# Altium PCB 显示面板.PcbDoc
Units mil, origin at the board's own origin, x right, y up, seen from the top; angles counter-clockwise.
Board outline 5905.51 x 1968.5 mil, 2 copper layers (Top Layer, Bottom Layer); 14 components, 16 nets, 74 pads, 3 vias.
Unrouted connection lines stored in the file: 2.
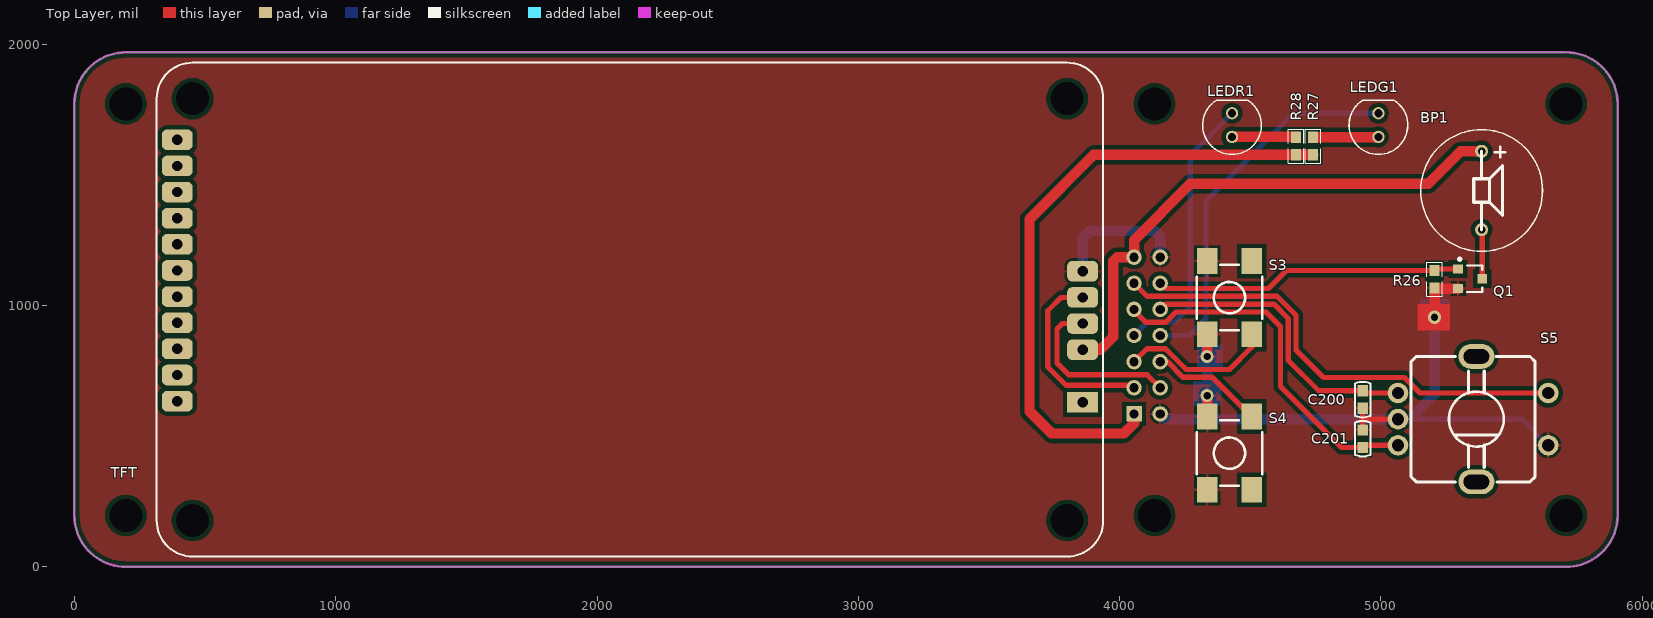
[diagram p0: Top Layer view]
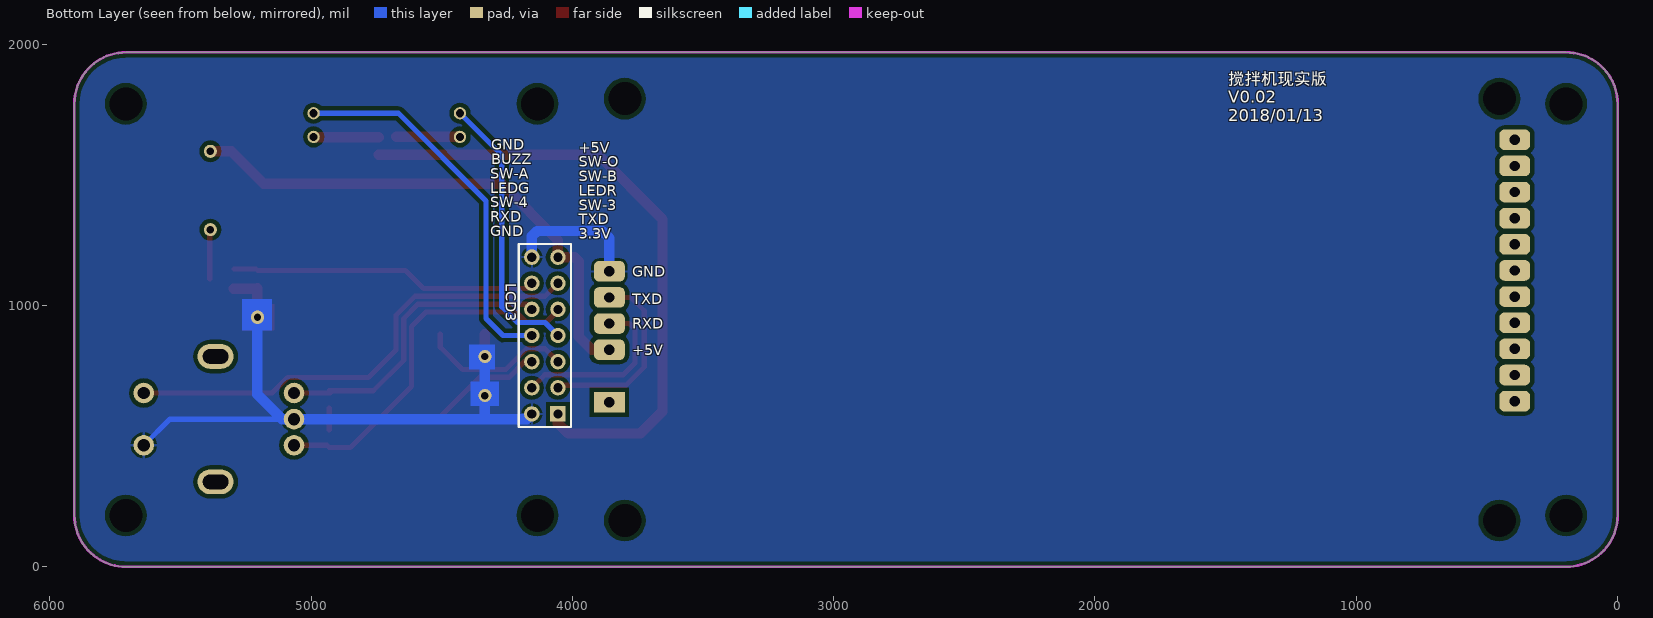
[diagram p1: Bottom Layer view, seen from below]
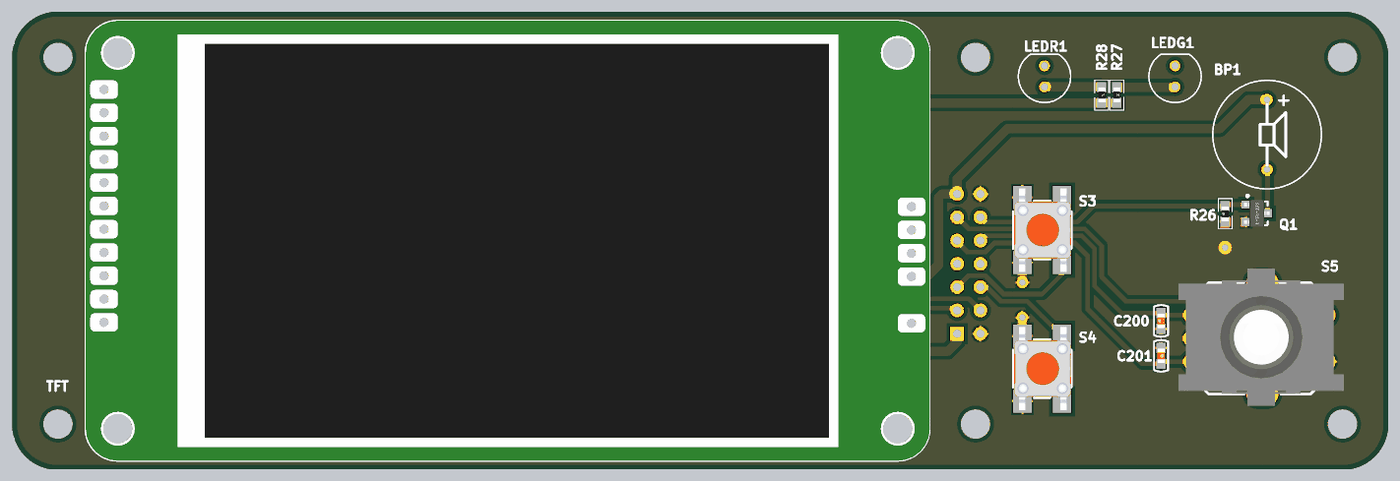
[diagram p2: 3D render of the assembled board from above, using the file's embedded part models]

## Layer stack, top to bottom
Top Solder: solder mask 0.4, Solder Resist, Dk 3.5
Top Layer: signal copper 1.4
Dielectric 1: dielectric 12.6, FR-4, Dk 4.8
Bottom Layer: signal copper 1.4
Bottom Solder: solder mask 0.4, Solder Resist, Dk 3.5

## Board outline
0,196.85 ccw(c196.85,196.85) 196.85,0 5707.72,0 ccw(c5708.66,196.85) 5905.51,196.85 5905.51,1771.65 ccw(c5708.66,1771.65) 5708.66,1968.5 196.85,1968.5 ccw(c196.85,1771.65) 0,1772.01

## Design rules (kind name [scope] priority, off if disabled: settings)
Clearance [All] p1: gap=10
PolygonConnect [All] p1: connectstyle=Relief reliefconductorwidth=10 reliefentries=4 polygonreliefangle="90 Angle" airgapwidth=10
RoutingVias [All] p1: holewidth=28 width=50 viastyle="Through Hole" minholewidth=28 minwidth=50 maxholewidth=28 maxwidth=50
SolderMaskExpansion [All] p1: expansion=4
Width [All] p1: maxlimit=40 minlimit=10 preferedwidth=10
30 further rules are at their usual default settings.

## Components (designator, comment, footprint, x,y, rotation, side; value= is the part's Value field where it differs from the comment)
BP1 "BUZZER" 蜂鸣器 5385,1440 r270 top
C200 "Cap" C-RAD-0603 4930,640 r90 top
C201 "Cap" C-RAD-0603 4930,490 r270 top
LCD3 "Header 7X2" HDR7X2_A1 4055,585 r90 bottom
LEDG1 "COLOUR" LEDφ6 4990,1645 r90 top
LEDR1 "COLOUR" LEDφ6 4430,1645 r90 top
Q1 "CJ2304" SOT-23 5341.14,1102.05 r270 top
R26 "Res1" 0603-1 5205,1100 r90 top
R27 "Res1" 0603-1 4740,1610 r270 top
R28 "Res1" 0603-1 4675,1610 r270 top
S3 "SW-PB4" SW_PB4_A1 4420,1030 r270 top
S4 "SW-PB4" SW_PB4_A1 4420,435 r270 top
S5 "SW-EC11" EC11 5365,565 r270 top
TFT "USART_LCD" 3.0寸 3937.01,1929.13 r180 top

## Footprints (in the part's own frame and the unit in brackets; to place one, negate y for a bottom-side part, rotate by r counter-clockwise, add the part's x,y. Pads: shape width x height; smd on the part's side, far side on the other; paste and mask are expansions set on the pad)
3.0寸 [mm]
  rect 3x2 hole 1: 1(2,33)
  rrect50% 3x2 hole 1: 2(2,27.9) 3(2,25.36) 4(2,22.82) 5(2,20.28) 6(90,7.5) 7(90,10.04) 8(90,12.58) 9(90,15.12) 10(90,17.66) 11(90,20.2) 12(90,22.74) 13(90,25.28) 14(90,27.82) 15(90,30.36) 16(90,32.9)
  round 1.016 hole 3.2: ""(3.5,44.5) ""(3.5,3.5) ""(88.5,3.5) ""(88.5,44.5)
  silkscreen extent 0,0 92,48, body extent -0.03,0 91.97,48, height 6.64
0603-1 [mm] "贴片带丝印"
  rect 1.1x1 smd: 1(-0.85,0) 2(0.85,0)
  silkscreen extent -1.65,-0.76 1.65,0.76, body extent -0.8,-0.38 0.8,0.42, height 0.3
C-RAD-0603 [mm] "贴片电容"
  rect 1.1x1 smd: 1(-0.85,0) 2(0.85,0)
  silkscreen extent -1.73,-0.76 1.73,0.76, body extent -0.8,-0.38 0.8,0.42, height 0.3
EC11 [mm]
  round 2 hole 1.2: 1(-2.54,-7.62) 2(0,-7.62) 3(2.54,-7.62) 4(2.54,6.985) 5(-2.54,6.985)
  oval 2.4x3.5 hole 1.4 slot 2.5 at 90 deg: 6(-6.096,0) 7(6.096,0)
  silkscreen extent -6.1,-6.35 6.1,5.72, body extent -7.63,-9.13 7.37,8.87, height 24.5
HDR7X2_A1 [mm] "Connector; Header; 7x2 Position"
  rect 1.5x1.5 hole 0.9: 1(0,0)
  round 1.5 hole 0.9: 2(0,2.54) 3(2.54,0) 4(2.54,2.54) 5(5.08,0) 6(5.08,2.54) 7(7.62,0) 8(7.62,2.54) 9(10.16,0) 10(10.16,2.54) 11(12.7,0) 12(12.7,2.54) 13(15.24,0) 14(15.24,2.54)
  silkscreen extent -1.27,-1.27 16.51,3.81
LEDφ6 [mm]
  round 1.2 hole 0.8: 1(0,0) 2(2.3,0)
  silkscreen extent -1.7,-2.85 3.56,2.85, body extent -1.86,-2.97 3.74,3.03, height 8.5
SOT-23 [mm]
  rect 0.9x0.95 smd: 1(-0.95,-1.175) 2(0.95,-1.175) 3(0,1.175)
  silkscreen extent -2.03,-1.14 1.3,1.18, body extent -1.45,-1.4 1.45,1.4, height 1.2
SW_PB4_A1 [mil] "6*6轻触按键"
  rect 98.42x78.74 smd: 1(-140,85) 2(-140,-85) 3(140,-85) 4(140,85)
  silkscreen extent -125,-125 125,125, body extent -179,-120 179,124, height 516
蜂鸣器 [mil]
  round 50 hole 28: 1(-150,0) 2(150,0)
  silkscreen extent -233,-233 233,233, body extent -236,-236 236,236, height 378

## Part data
BP1: "蜂鸣器"
C200 C201: "无极性电容"
LCD3: "Header, 7-Pin"
LEDG1 LEDR1: library part ledφ6
Q1: library part MOSFET-N, "N-Channel MOSFET"
R26 R27 R28: "贴片电阻"
S3 S4: "微动开关"
S5: "旋转编码开关"
TFT: "usart串口屏"

## Free pads (board coordinates)
  round 59.06 hole 125.98: 0(196.85,1771.65) 1(196.85,196.85) 1(4133.86,196.85) 1(4133.86,1771.65) 1(5708.66,196.85) 1(5708.66,1771.65)

## Via types
v1: diameter 50, hole 28, Top Layer to Bottom Layer, 3 vias

## Nets (pads, with @x,y where several pads share a name; then routed paths per layer and width w, separated by ;. In a path a pad name is that pad's centre, name@x,y a point inside that pad or via, vN(x,y) a via of type N, cw(c..) or ccw(c..) an arc to the next point about the centre after c; other vN are vias at no path point)
+5V: BP1.1 LCD3.13 TFT.2 | length 2049.2
  Top Layer w40: TFT.2 3925.71,830.71 3975,880 3975,1170 3990,1185 LCD3.13 4055,1250 4270,1465 5180,1465 5305,1590 BP1.1
BUZZ: LCD3.12 Q1.1 R26.2 | length 1170.5
  Top Layer w20: LCD3.12 4175,1065 4570,1065 4638.46,1133.46 R26.2 ; R26.2@5210.98,1139.45 Q1.1
GND: C200.1 C201.1 LCD3.2 LCD3.14 Q1.2 R26.1 S3.2 S3.3 S4.2 S4.3 S5.2 S5.4 TFT.5 | length 3308
  Top Layer w20: C201.1 4930,565 ; C200.1 4930,565 ; S5.2 4930,565
  Top Layer w40: S4.2 v1(4335,655) ; v1(4335,805) S3.3 ; v1(5205,955) R26.1 5206.89,1064.65 Q1.2
  Bottom Layer w20: 5110,565 5540,565 S5.4
  Bottom Layer w40: TFT.5 3858.27,1258.27 3885,1285 4135,1285 4155,1265 LCD3.14 ; LCD3.2 4175,565 S5.2 5110,565 5205,660 v1(5205,955) ; 4335,570 v1(4335,655) v1(4335,805)
LCD_RXD: LCD3.4 TFT.3 | length 671.2
  Top Layer w20: TFT.3 3780.71,930.71 3760,910 3760,780 3805.47,734.53 4105.47,734.53 LCD3.4
LCD_TXD: LCD3.3 TFT.4 | length 732.4
  Top Layer w20: TFT.4 3775.71,1030.71 3725,980 3725,765 3795,695 4045,695 LCD3.3
LEDG: LCD3.8 LEDG1.2 | length 1450.9
  Bottom Layer w20: LCD3.8 4265,885 4330,950 4330,1400 4665.55,1735.55 LEDG1.2
LEDR: LCD3.7 LEDR1.2 | length 1067.4
  Bottom Layer w20: LCD3.7 4105,935 4210,935 4270,995 4270,1575.55 LEDR1.2
NetBP1_2: BP1.2 Q1.3 | length 185.6
  Top Layer w20: Q1.3 BP1.2@5387.4,1287.6
NetLEDG1_1: LEDG1.1 R27.1 | length 248.5
  Top Layer w40: R27.1 LEDG1.1@4988.46,1643.46
NetLEDR1_1: LEDR1.1 R28.1 | length 243.5
  Top Layer w40: LEDR1.1 R28.1@4673.46,1645
SW-3: LCD3.5 S3.1 S3.4 | length 588.7
  Top Layer w20: LCD3.5 4104.53,834.53 4175.51,834.53 4255.04,755 4420,755 4505,840 S3.4
SW-4: LCD3.6 S4.1 S4.4 | length 437
  Top Layer w20: LCD3.6 4182.62,785 4242.62,725 4355,725 S4.1
SW_A: C200.2 LCD3.10 S5.1 | length 1154.3
  Top Layer w20: LCD3.10 4175,1005 4590,1005 4645,950 4645,790 4761.54,673.46 C200.2 ; C200.2@4925,665 S5.1
SW_B: C201.2 LCD3.9 S5.3 | length 1390.3
  Top Layer w20: LCD3.9 4055,980.94 4100.47,935.47 4175.51,935.47 4215.04,975 4560,975 4615,920 4615,690 4848.46,456.54 C201.2 ; C201.2@4938.46,465 S5.3
SW_O: LCD3.11 S5.5 | length 1836.5
  Top Layer w20: LCD3.11 4105,1035 4602.43,1035 4675,962.43 4675,830 4780.63,724.37 5089.59,724.37 5148.96,665 S5.5
VCC3.3: LCD3.1 R27.2 R28.2 | length 2408.9
  Top Layer w40: LCD3.1 4055,550 4015,510 3740,510 3655,595 3655,1330 3901.54,1576.54 R28.2 R27.2
pads on no net: S5.6 S5.7 TFT. TFT.1 TFT.6 TFT.7 TFT.8 TFT.9 TFT.10 TFT.11 TFT.12 TFT.13 TFT.14 TFT.15 TFT.16

## Polygon pours and split planes (outlines as drawn)
GND on Top Layer "Top Layer-No Net" (solid, remove dead copper, pour order 0): 5905.51,1735 5905.51,1765 5905.51,1974.49 5905,1975 5620,1975 0,1975 0,1885 0,0 75,0 5905,0
GND on Bottom Layer "Top Layer-No Net" (solid, remove dead copper, pour order 2): 5480,0 5610,0 5900,0 5900,50 5900,1970 5845,1970 0,1970 0,0

## Keep-outs
Keep-Out Layer:
  the board outline again, w10

## Other copper
Top Layer:
  rectangle net GND: 5140,905 5265,1005
Bottom Layer:
  rectangle net GND: 4295,755 4395,850
  rectangle net GND: 4280,615 4390,710
  rectangle net GND: 5150,905 5265,1025

## Silkscreen, mask and mechanical layers (free items; w line width, h text height)
Bottom Overlay:
  text "搅拌机现实版" at 1489.92,1830 h80
  text "V0.02" at 1489.84,1760 h80
  text "2018/01/13" at 1490,1690 h80
  text "GND" at 4310,1595 h40
  text "+5V" at 3975,1585 h40
  text "BUZZ" at 4310,1540 h40
  text "SW-O" at 3975,1530 h40
  text "SW-A" at 4315,1485 h40
  text "SW-B" at 3975,1475 h40
  text "LEDG" at 4315,1430 h40
  text "LEDR" at 3975,1420 h40
  text "SW-4" at 4315,1375 h40
  text "SW-3" at 3975,1365 h40
  text "RXD" at 4315,1320 h40
  text "TXD" at 3975,1310 h40
  text "GND" at 4315,1265 h40
  text "3.3V" at 3975,1255 h40
  text "GND" at 3770,1110 h40
  text "TXD" at 3770,1005 h40
  text "RXD" at 3770,910 h40
  text "+5V" at 3770,810 h40